# EAGLE board Modemplatine_modem1_2 (EAGLE 6.1)
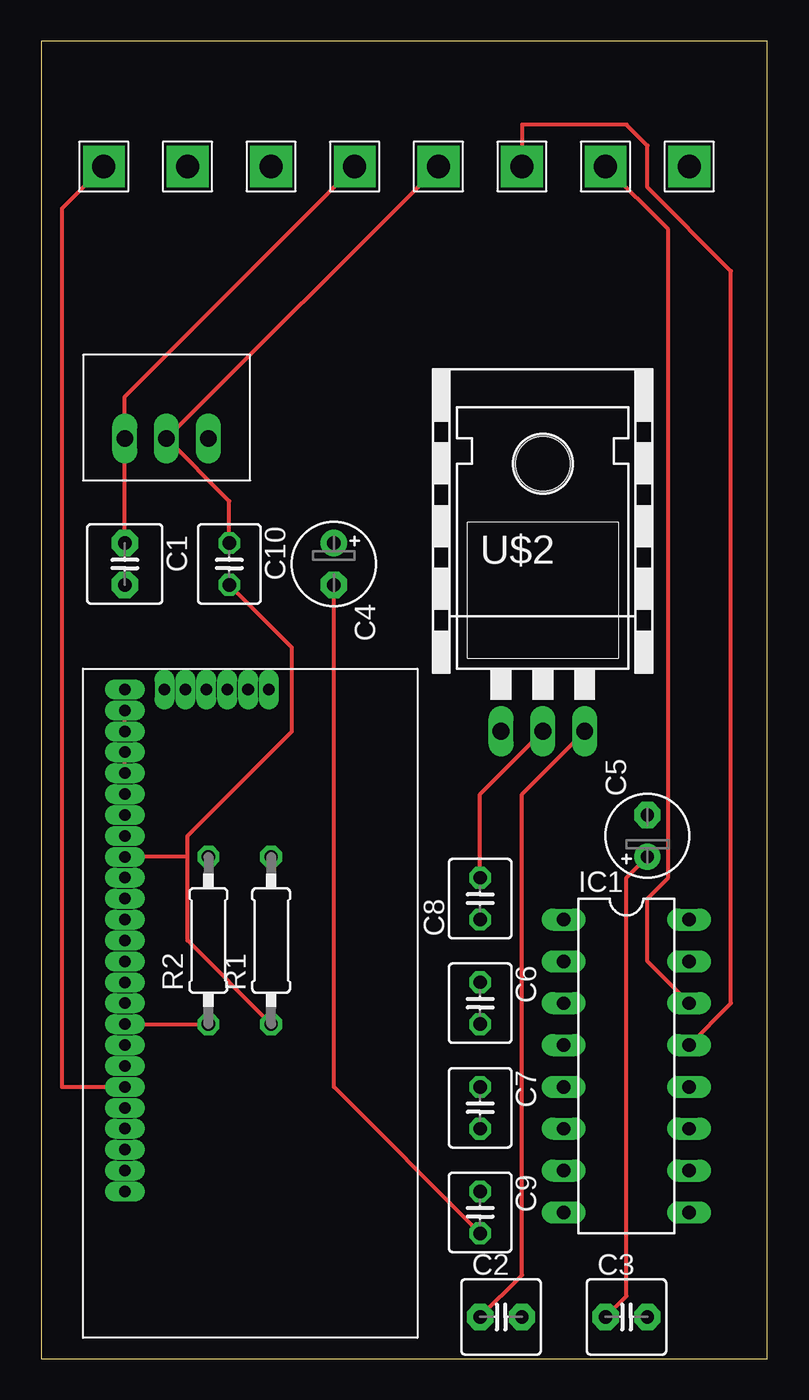
[diagram p0: board, top side]
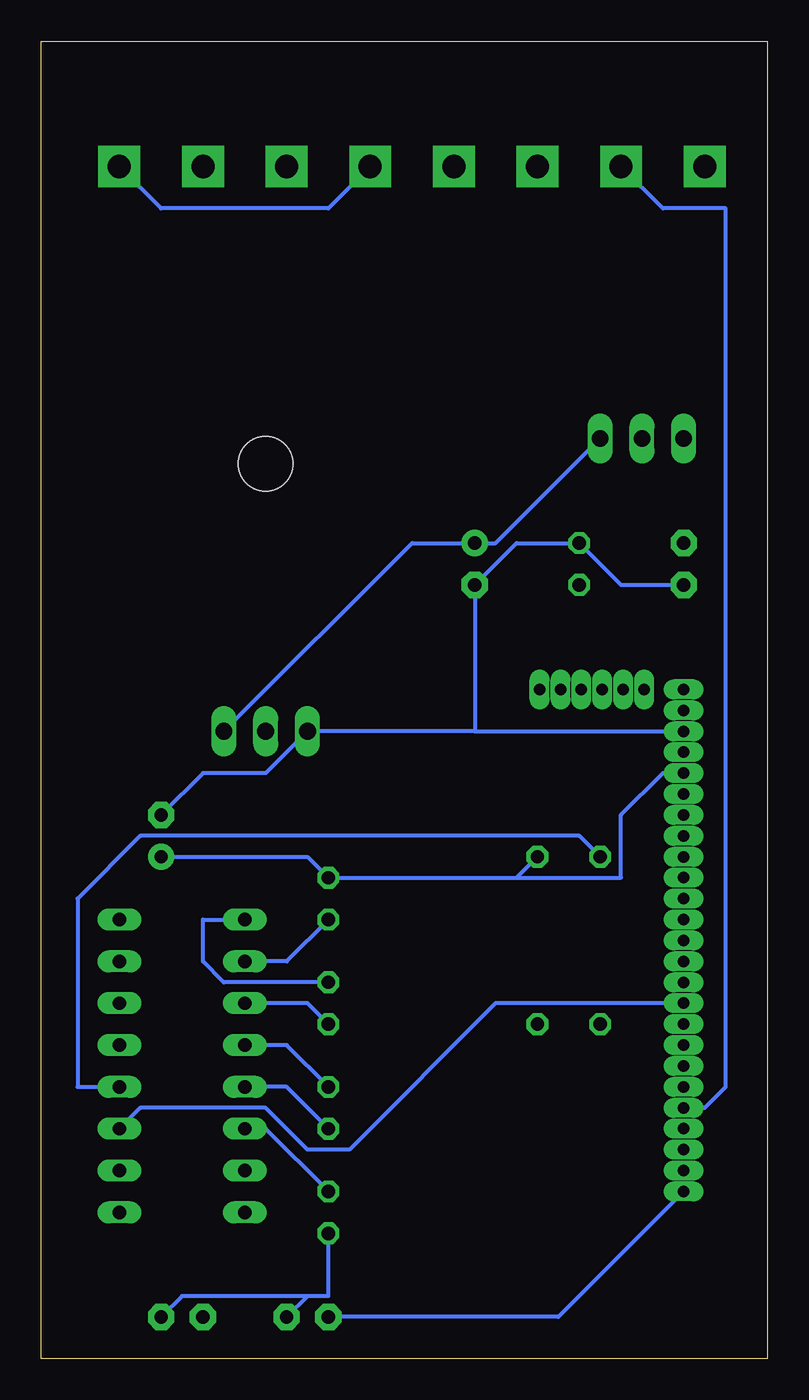
[diagram p1: board, bottom side, seen from below]

Size 44.12 x 80 mm. Coordinates in mm from the lower left corner, seen from the top.
Outline: 0,0 44.12,0 44.12,80 0,80 0,0
Copper layers (1*16): Top 0.035mm / dielectric 1.5mm / Bottom 0.035mm
Design rules: minimum track width 10mil, minimum drill 24mil, track to track 8mil, track to pad 8mil, pad to pad 8mil, via to via 8mil, smd to smd 8mil, copper to edge 40mil, drill to drill 8mil, minimum pad ring 10mil, minimum via ring 8mil, stop-mask expansion 4mil, vias tented up to drill 0mil, thermal gap 10mil

## Footprints (pad centres in the part's own frame; a part is rotated, then mirrored left to right if it is on the bottom)
C2.5-5 = drill 0.813 pad 1.6 octagon: 1 -1.27,0; 2 1.27,0
E2,5-5 = drill 0.813 pad 1.6: + -1.27,0 | drill 0.813 pad 1.6 octagon: - 1.27,0
C025-040X050 = drill 0.813 octagon: 1 -1.27,0; 2 1.27,0
DIL16 = drill 0.813 long: 1 -8.89,-3.81; 2 -6.35,-3.81; 3 -3.81,-3.81; 4 -1.27,-3.81; 5 1.27,-3.81; 6 3.81,-3.81; 7 6.35,-3.81; 8 8.89,-3.81; 9 8.89,3.81; 10 6.35,3.81; 11 3.81,3.81; 12 1.27,3.81; 13 -1.27,3.81; 14 -3.81,3.81; 15 -6.35,3.81; 16 -8.89,3.81
PIN2 = drill 1.4 pad 2.54 square: P$1 0,0
0207/10 = drill 0.813 octagon: 1 -5.08,0; 2 5.08,0
RECOM785X = drill 1 long: GND 0,2.54; VIN -2.54,2.54; VOUT 2.54,2.54
TS1084 = drill 1.016 long: 1GND 5.08,1.27; 2OUT 7.62,1.27; 3IN 10.16,1.27 | hole 3.302: 7.62,17.526
MODEM_FUSS = drill 0.7 pad 0.813 long: P$1 -20.32,-8.89; P$2 -19.05,-8.89; P$3 -17.78,-8.89; P$4 -16.51,-8.89; P$5 -15.24,-8.89; P$6 -13.97,-8.89; P$7 -12.7,-8.89; P$8 -11.43,-8.89; P$9 -10.16,-8.89; P$10 -8.89,-8.89; P$11 -7.62,-8.89; P$12 -6.35,-8.89; P$13 -5.08,-8.89; P$14 -3.81,-8.89; P$15 -2.54,-8.89; P$16 -1.27,-8.89; P$17 0,-8.89; P$18 1.27,-8.89; P$19 2.54,-8.89; P$20 3.81,-8.89; P$21 5.08,-8.89; P$22 6.35,-8.89; P$23 7.62,-8.89; P$24 8.89,-8.89; P$25 10.16,-8.89; P$29 -20.32,-3.937; P$30 -20.32,-5.207; P$31 -20.32,-6.477 | drill 0.7 pad 0.61 long: P$26 -20.32,-0.127; P$27 -20.32,-1.397; P$28 -20.32,-2.667

## Placement (x,y rotation side)
C1  [C2.5-5]  5.08,48.26 270 top
C2  [C2.5-5]  27.94,2.54 0 top
C3  [C2.5-5]  35.56,2.54 0 top
C4  [E2,5-5]  17.78,48.26 270 top
C5  [E2,5-5]  36.83,31.75 90 top
C6  [C025-040X050]  26.67,21.59 270 top
C7  [C025-040X050]  26.67,15.24 270 top
C8  [C025-040X050]  26.67,27.94 90 top
C9  [C025-040X050]  26.67,8.89 270 top
C10  [C025-040X050]  11.43,48.26 270 top
E$1  [A4L-LOC]  -74.93,-40.64 0 top  (outside the outline)
IC1  MAX232  [DIL16]  35.56,17.78 270 top
LINE1  PN4  [PIN2]  3.81,72.39 0 top
LINE2  PN4  [PIN2]  8.89,72.39 0 top
R1  [0207/10]  13.97,25.4 90 top
R2  [0207/10]  10.16,25.4 90 top
U$1  RECOM_785_05  [RECOM785X]  7.62,53.34 0 top
U$2  TS1084  [TS1084]  22.86,36.83 0 top
U$3  MODEMSTECKER  [MODEM_FUSS]  13.97,20.32 270 top
U$4  PN4  [PIN2]  24.13,72.39 0 top
U$5  PN4  [PIN2]  19.05,72.39 0 top
U$6  PN4  [PIN2]  34.29,72.39 0 top
U$7  PN4  [PIN2]  29.21,72.39 0 top
U$8  PN4  [PIN2]  39.37,72.39 0 top
U$11  PN4  [PIN2]  13.97,72.39 0 top

## Library data of the parts
C1-C3 = capacitor-wima
C4-C10 R1 R2 = resistor
E$1 = frames
IC1 = maxim; MF: MAXIM; MPN: MAX232ACPE+; OC_FARNELL: 9723773; OC_NEWARK: 68K4544
LINE1 LINE2 U$4-U$8 U$11 = Strommessung
U$1 U$3 = ADS
U$2 = ADS1

## Nets
GND: IC1.15
N$1: C1.1 U$1.VIN U$5.P$1
N$2: C1.2 C2.2 C3.2 C4.- C5.- C9.2 C10.1 U$1.GND U$2.1GND U$3.P$2 U$3.P$3 U$4.P$1 U$8.P$1
N$3: C2.1 C4.+ U$1.VOUT U$2.3IN U$3.P$25
N$4: C3.1 C5.+ C8.2 R1.2 U$2.2OUT U$3.P$4 U$3.P$5
N$5: LINE2.P$1 U$3.P$21
N$6: LINE1.P$1 U$3.P$20
N$7: C6.1 IC1.1
N$8: C6.2 IC1.3
N$9: C7.1 IC1.4
N$10: C7.2 IC1.5
N$11: C8.1 IC1.2
N$12: C9.1 IC1.6
N$14: IC1.14 U$6.P$1
N$15: IC1.13 U$7.P$1
N$16: IC1.11 U$3.P$16
N$17: IC1.12 R2.2
N$18: R2.1 U$3.P$17
N$19: C10.2 R1.1 U$3.P$9
VCC: IC1.16

## Tracks (layer width: path | path; a pad name or v marks a point on that pad's centre or on a via)
N$1
  Top 0.254: C1.1 U$1.VIN 5.08,58.42 U$5.P$1
N$2
  Top 0.254: U$3.P$3 U$3.P$2 | C10.1 11.43,52.07 U$1.GND U$4.P$1 | C9.2 17.78,16.51 C4.-
  Bottom 0.254: 17.78,38.1 U$2.1GND 30.48,35.56 34.29,35.56 C5.- | 17.78,38.1 U$3.P$3 | C9.2 26.67,3.81 27.94,3.81 | 27.94,3.81 C2.2 | C3.2 35.56,3.81 27.94,3.81 | C1.2 8.89,46.99 C10.1 15.24,49.53 C4.- 17.78,38.1 | U$8.P$1 36.83,69.85 26.67,69.85 U$4.P$1
N$3
  Top 0.254: C2.1 29.21,5.08 29.21,34.29 U$2.3IN
  Bottom 0.254: U$3.P$25 12.7,2.54 C2.1 | U$1.VOUT 16.51,49.53 C4.+ 21.59,49.53 U$2.3IN
N$4
  Top 0.254: U$3.P$5 U$3.P$4 | U$2.2OUT 26.67,34.29 C8.2 | C3.1 35.56,3.81 35.56,29.21 C5.+
  Bottom 0.254: C5.+ 27.94,30.48 C8.2 15.24,29.21 | 15.24,29.21 R1.2 | U$3.P$5 6.35,35.56 8.89,33.02 8.89,29.21 15.24,29.21
N$5
  Bottom 0.254: U$3.P$21 3.81,15.24 2.54,16.51 2.54,69.85 6.35,69.85 LINE2.P$1
N$6
  Top 0.254: U$3.P$20 1.27,16.51 1.27,69.85 LINE1.P$1
N$7
  Bottom 0.254: C6.1 33.02,22.86 34.29,24.13 34.29,26.67 IC1.1
N$8
  Bottom 0.254: C6.2 27.94,21.59 IC1.3
N$9
  Bottom 0.254: C7.1 29.21,19.05 IC1.4
N$10
  Bottom 0.254: C7.2 29.21,16.51 IC1.5
N$11
  Bottom 0.254: C8.1 29.21,24.13 IC1.2
N$12
  Bottom 0.254: C9.1 30.48,13.97 IC1.6
N$14
  Top 0.254: IC1.14 36.83,24.13 36.83,27.94 38.1,29.21 38.1,68.58 U$6.P$1
N$15
  Top 0.254: IC1.13 41.91,21.59 41.91,66.04 36.83,71.12 36.83,73.66 35.56,74.93 29.21,74.93 U$7.P$1
N$16
  Bottom 0.254: U$3.P$16 16.51,21.59 25.4,12.7 27.94,12.7 30.48,15.24 38.1,15.24 IC1.11
N$17
  Bottom 0.254: R2.2 11.43,31.75 38.1,31.75 41.91,27.94 41.91,16.51 IC1.12
N$18
  Top 0.254: U$3.P$17 R2.1
N$19
  Top 0.254: 8.89,30.48 U$3.P$9 | 8.89,30.48 8.89,25.4 R1.1 | C10.2 15.24,43.18 15.24,38.1 8.89,31.75 8.89,30.48